# EAGLE board IO V1.0 (EAGLE 9.6.2)
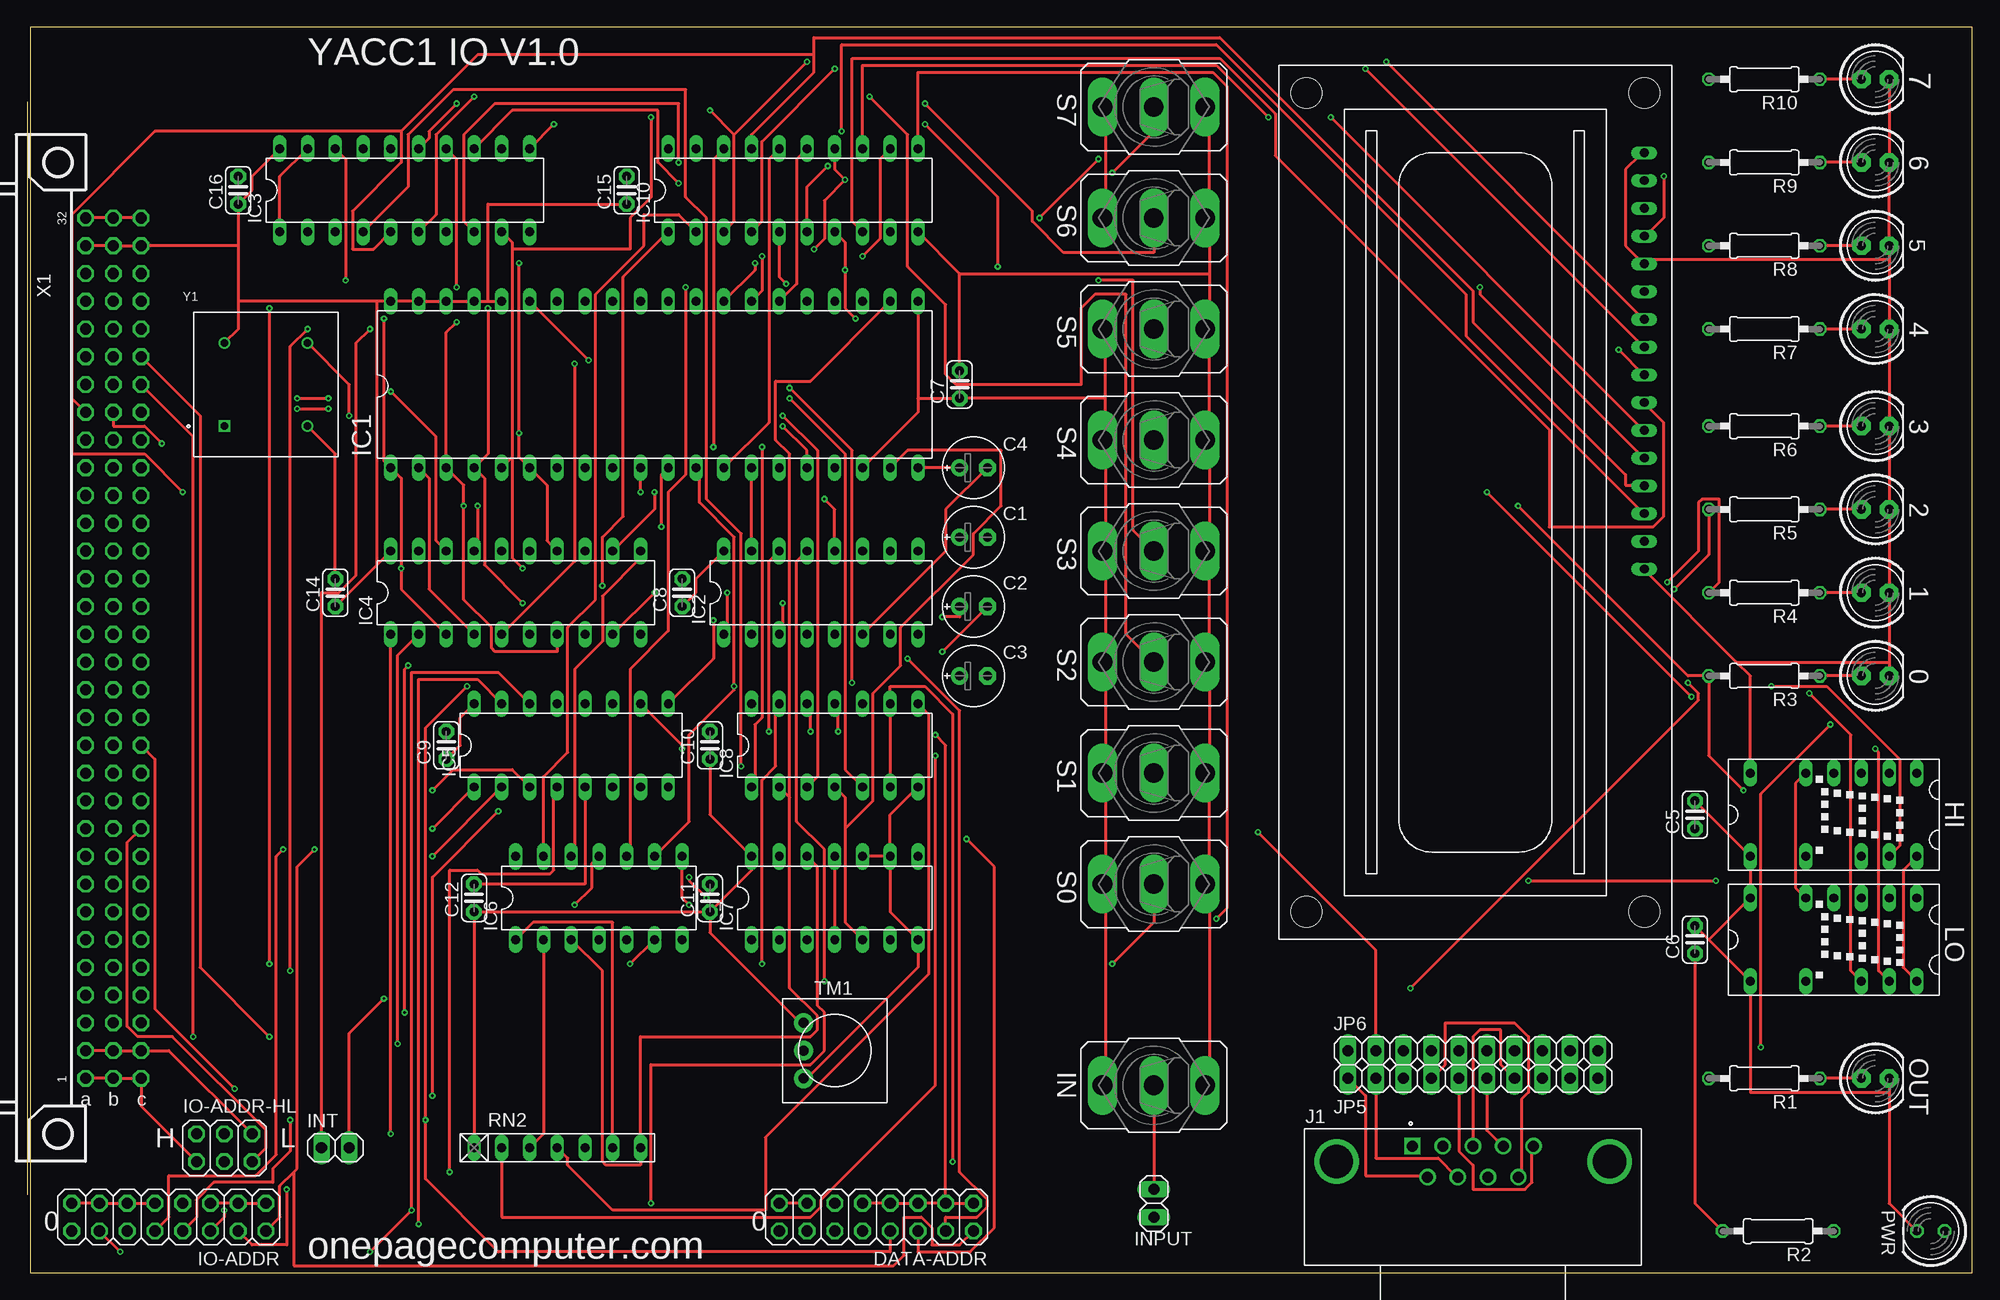
[diagram p0: board, top side]
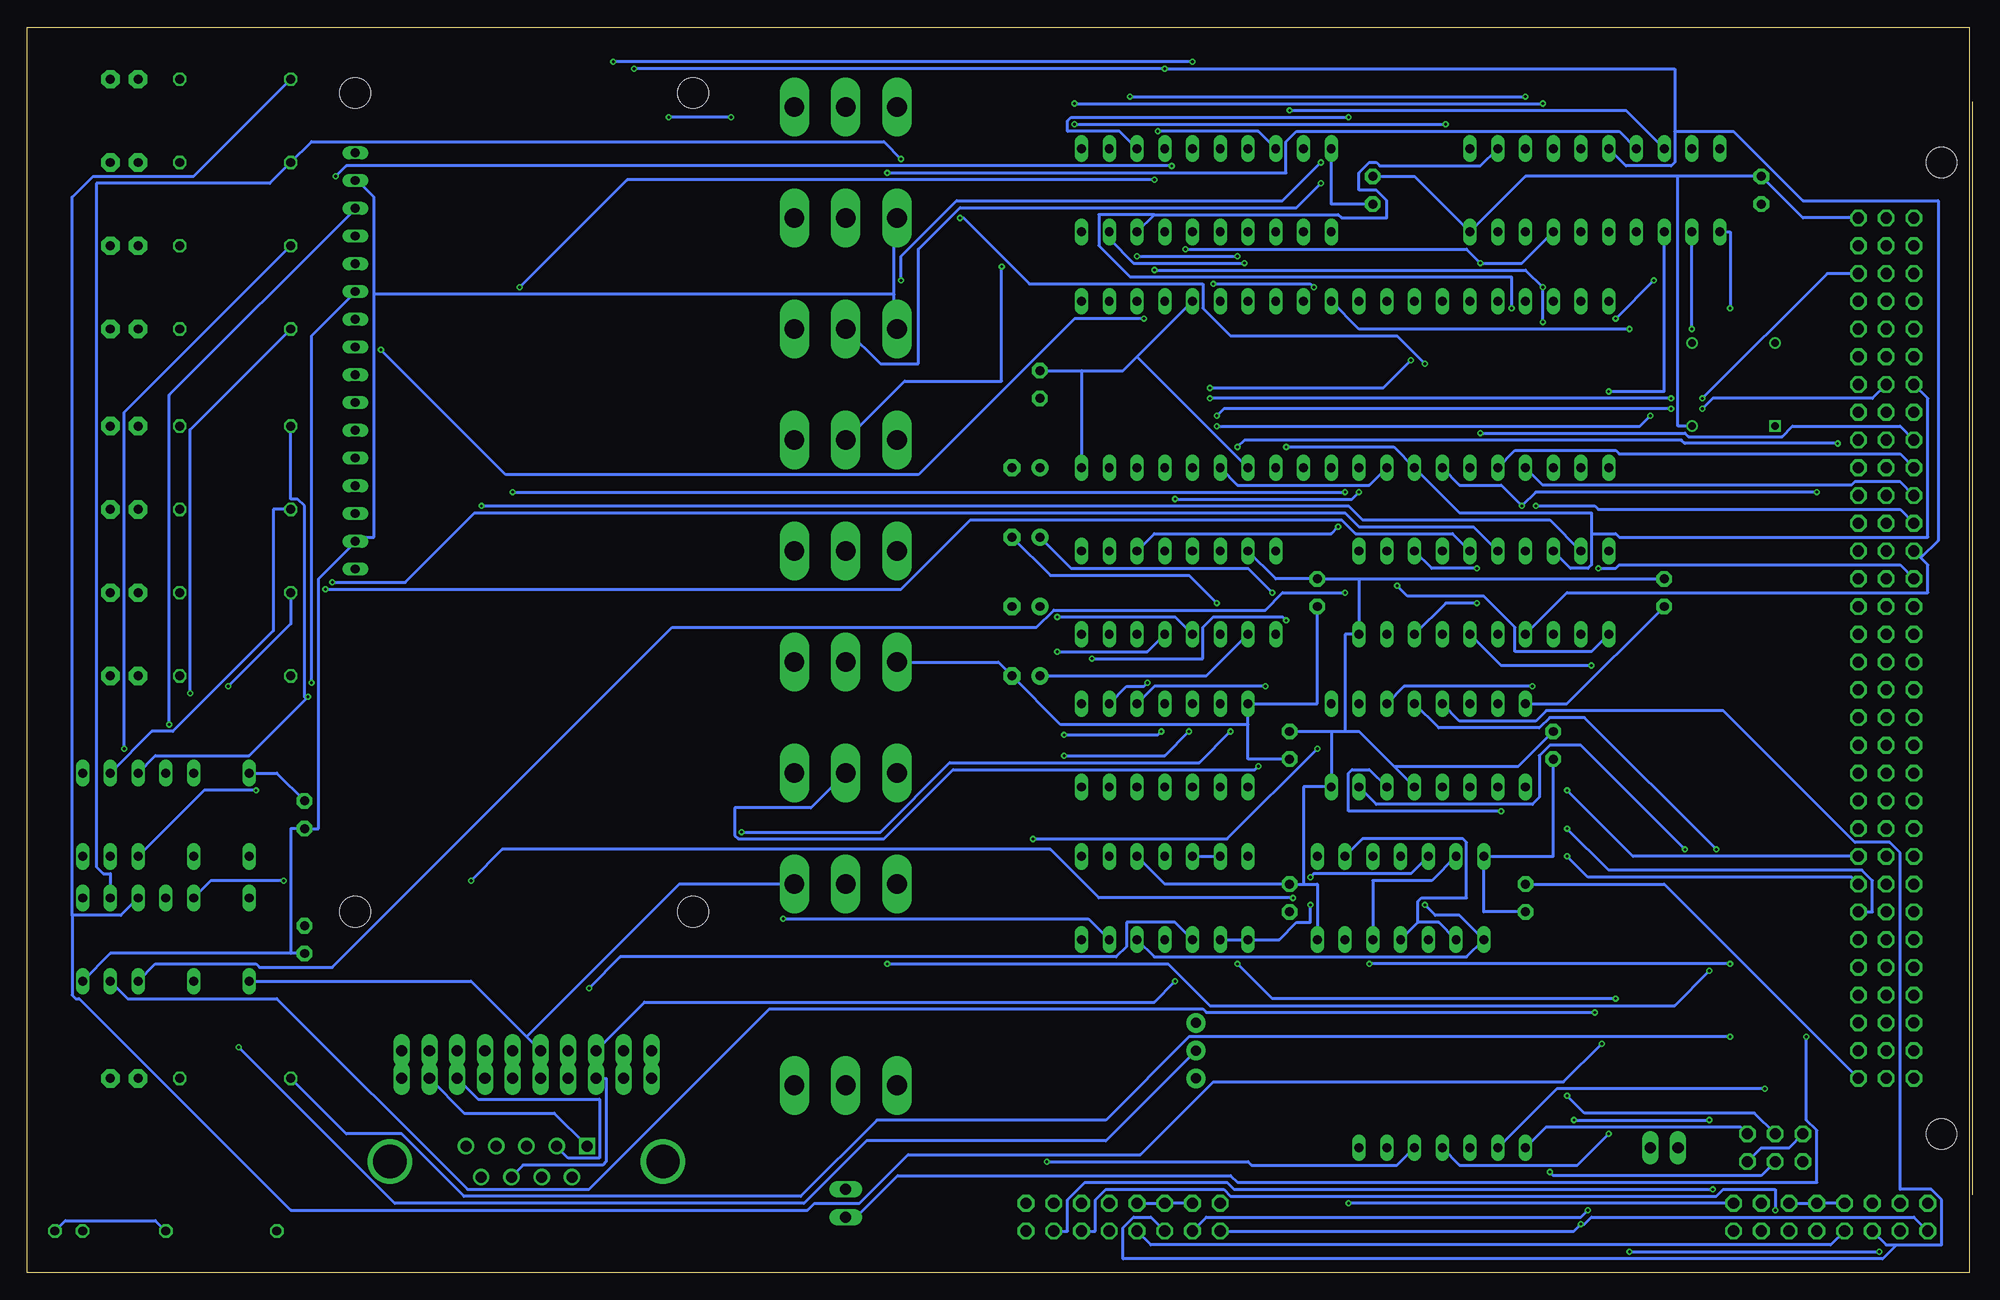
[diagram p1: board, bottom side, seen from below]

Size 177.78 x 113.97 mm. Coordinates in mm from the lower left corner, seen from the top.
Outline: 0,0 177.78,0 177.78,113.97 0,113.97 0,0
Copper layers (1*16): Top 0.035559375mm / dielectric 1.6mm / Bottom 0.035559375mm
Design rules "oshpark-2layer-auto-routing": minimum track width 10mil, minimum drill 10mil, track to track 10mil, track to pad 8mil, pad to pad 8mil, via to via 8mil, smd to smd 6mil, copper to edge 15mil, drill to drill 6mil, minimum pad ring 6mil, minimum via ring 6mil, stop-mask expansion 2.5mil, vias tented up to drill 0mil, thermal gap 10mil
Net classes: 1 GND: width 1 mm; 2 5V: width 1 mm

## Footprints (pad centres in the part's own frame; a part is rotated, then mirrored left to right if it is on the bottom)
LED5MM = drill 0.813 pad 1.676 octagon: A -1.27,0; K 1.27,0
E2,5-6E = drill 0.813 pad 1.575: + -1.27,0 | drill 0.813 pad 1.575 octagon: - 1.27,0
C025-024X044 = drill 0.813 pad 1.422 octagon: 1 -1.27,0; 2 1.27,0
2X08 = drill 1.016 octagon: 1 -8.89,-1.27; 2 -8.89,1.27; 3 -6.35,-1.27; 4 -6.35,1.27; 5 -3.81,-1.27; 6 -3.81,1.27; 7 -1.27,-1.27; 8 -1.27,1.27; 9 1.27,-1.27; 10 1.27,1.27; 11 3.81,-1.27; 12 3.81,1.27; 13 6.35,-1.27; 14 6.35,1.27; 15 8.89,-1.27; 16 8.89,1.27
HTIL311A = drill 0.813 long: 1 -3.81,7.62; 2 -3.81,5.08; 3 -3.81,2.54; 4 -3.81,0; 5 -3.81,-2.54; 7 -3.81,-7.62; 8 3.81,-7.62; 10 3.81,-2.54; 12 3.81,2.54; 13 3.81,5.08; 14 3.81,7.62
DIL40 = drill 0.813 long: 1 -24.13,-7.62; 2 -21.59,-7.62; 3 -19.05,-7.62; 4 -16.51,-7.62; 5 -13.97,-7.62; 6 -11.43,-7.62; 7 -8.89,-7.62; 8 -6.35,-7.62; 9 -3.81,-7.62; 10 -1.27,-7.62; 11 1.27,-7.62; 12 3.81,-7.62; 13 6.35,-7.62; 14 8.89,-7.62; 15 11.43,-7.62; 16 13.97,-7.62; 17 16.51,-7.62; 18 19.05,-7.62; 19 21.59,-7.62; 20 24.13,-7.62; 21 24.13,7.62; 22 21.59,7.62; 23 19.05,7.62; 24 16.51,7.62; 25 13.97,7.62; 26 11.43,7.62; 27 8.89,7.62; 28 6.35,7.62; 29 3.81,7.62; 30 1.27,7.62; 31 -1.27,7.62; 32 -3.81,7.62; 33 -6.35,7.62; 34 -8.89,7.62; 35 -11.43,7.62; 36 -13.97,7.62; 37 -16.51,7.62; 38 -19.05,7.62; 39 -21.59,7.62; 40 -24.13,7.62
DIL16 = drill 0.813 long: 1 -8.89,-3.81; 2 -6.35,-3.81; 3 -3.81,-3.81; 4 -1.27,-3.81; 5 1.27,-3.81; 6 3.81,-3.81; 7 6.35,-3.81; 8 8.89,-3.81; 9 8.89,3.81; 10 6.35,3.81; 11 3.81,3.81; 12 1.27,3.81; 13 -1.27,3.81; 14 -3.81,3.81; 15 -6.35,3.81; 16 -8.89,3.81
DIL20 = drill 0.813 long: 1 -11.43,-3.81; 2 -8.89,-3.81; 3 -6.35,-3.81; 4 -3.81,-3.81; 5 -1.27,-3.81; 6 1.27,-3.81; 7 3.81,-3.81; 8 6.35,-3.81; 9 8.89,-3.81; 10 11.43,-3.81; 11 11.43,3.81; 12 8.89,3.81; 13 6.35,3.81; 14 3.81,3.81; 15 1.27,3.81; 16 -1.27,3.81; 17 -3.81,3.81; 18 -6.35,3.81; 19 -8.89,3.81; 20 -11.43,3.81
DIL14 = drill 0.813 long: 1 -7.62,-3.81; 2 -5.08,-3.81; 3 -2.54,-3.81; 4 0,-3.81; 5 2.54,-3.81; 6 5.08,-3.81; 7 7.62,-3.81; 8 7.62,3.81; 9 5.08,3.81; 10 2.54,3.81; 11 0,3.81; 12 -2.54,3.81; 13 -5.08,3.81; 14 -7.62,3.81
M9040P = drill 1.803 long: 1 0,4.699; 2 0,0; 3 0,-4.699
1X02 = drill 1.016 long: 1 -1.27,0; 2 1.27,0
2X03 = drill 1.016 octagon: 1 -2.54,-1.27; 2 -2.54,1.27; 3 0,-1.27; 4 0,1.27; 5 2.54,-1.27; 6 2.54,1.27
A-DS09A/KG-T2S = drill 1 square: 1 -5.54,1.42 | drill 1: 2 -2.77,1.42; 3 0,1.42; 4 2.77,1.42; 5 5.54,1.42; 6 4.155,-1.42; 7 1.385,-1.42; 8 -1.385,-1.42; 9 -4.155,-1.42 | drill 3.05: P$1 -12.495,0; P$2 12.495,0
1X10 = drill 1.016 long: 1 -11.43,0; 2 -8.89,0; 3 -6.35,0; 4 -3.81,0; 5 -1.27,0; 6 1.27,0; 7 3.81,0; 8 6.35,0; 9 8.89,0; 10 11.43,0
LED5MM' = drill 0.813 octagon: A -1.27,0; K 1.27,0
0207/10 = drill 0.813 octagon: 1 -5.08,0; 2 5.08,0
RN-7 = drill 0.813 long: 1 -7.62,0; 2 -5.08,0; 3 -2.54,0; 4 0,0; 5 2.54,0; 6 5.08,0; 7 7.62,0
TRIM-3386 = drill 0.9 pad 1.778: 1 -2.54,-2.857; 2 0,-2.857; 3 2.54,-2.857
FABC96R = drill 1.016 octagon: A1 -2.54,39.37; A2 -2.54,36.83; A3 -2.54,34.29; A4 -2.54,31.75; A5 -2.54,29.21; A6 -2.54,26.67; A7 -2.54,24.13; A8 -2.54,21.59; A9 -2.54,19.05; A10 -2.54,16.51; A11 -2.54,13.97; A12 -2.54,11.43; A13 -2.54,8.89; A14 -2.54,6.35; A15 -2.54,3.81; A16 -2.54,1.27; A17 -2.54,-1.27; A18 -2.54,-3.81; A19 -2.54,-6.35; A20 -2.54,-8.89; A21 -2.54,-11.43; A22 -2.54,-13.97; A23 -2.54,-16.51; A24 -2.54,-19.05; A25 -2.54,-21.59; A26 -2.54,-24.13; A27 -2.54,-26.67; A28 -2.54,-29.21; A29 -2.54,-31.75; A30 -2.54,-34.29; A31 -2.54,-36.83; A32 -2.54,-39.37; B1 -5.08,39.37; B2 -5.08,36.83; B3 -5.08,34.29; B4 -5.08,31.75; B5 -5.08,29.21; B6 -5.08,26.67; B7 -5.08,24.13; B8 -5.08,21.59; B9 -5.08,19.05; B10 -5.08,16.51; B11 -5.08,13.97; B12 -5.08,11.43; B13 -5.08,8.89; B14 -5.08,6.35; B15 -5.08,3.81; B16 -5.08,1.27; B17 -5.08,-1.27; B18 -5.08,-3.81; B19 -5.08,-6.35; B20 -5.08,-8.89; B21 -5.08,-11.43; B22 -5.08,-13.97; B23 -5.08,-16.51; B24 -5.08,-19.05; B25 -5.08,-21.59; B26 -5.08,-24.13; B27 -5.08,-26.67; B28 -5.08,-29.21; B29 -5.08,-31.75; B30 -5.08,-34.29; B31 -5.08,-36.83; B32 -5.08,-39.37; C1 -7.62,39.37; C2 -7.62,36.83; C3 -7.62,34.29; C4 -7.62,31.75; C5 -7.62,29.21; C6 -7.62,26.67; C7 -7.62,24.13; C8 -7.62,21.59; C9 -7.62,19.05; C10 -7.62,16.51; C11 -7.62,13.97; C12 -7.62,11.43; C13 -7.62,8.89; C14 -7.62,6.35; C15 -7.62,3.81; C16 -7.62,1.27; C17 -7.62,-1.27; C18 -7.62,-3.81; C19 -7.62,-6.35; C20 -7.62,-8.89; C21 -7.62,-11.43; C22 -7.62,-13.97; C23 -7.62,-16.51; C24 -7.62,-19.05; C25 -7.62,-21.59; C26 -7.62,-24.13; C27 -7.62,-26.67; C28 -7.62,-29.21; C29 -7.62,-31.75; C30 -7.62,-34.29; C31 -7.62,-36.83; C32 -7.62,-39.37 | hole 2.794: 0,-44.456; 0,44.456
LCD1602 = drill 0.8 long: 1 8,33.46; 2 10.54,33.46; 3 13.08,33.46; 4 15.62,33.46; 5 18.16,33.46; 6 20.7,33.46; 7 23.24,33.46; 8 25.78,33.46; 9 28.32,33.46; 10 30.86,33.46; 11 33.4,33.46; 12 35.94,33.46; 13 38.48,33.46; 14 41.02,33.46; 15 43.56,33.46; 16 46.1,33.46 | hole 2.8: 2.54,2.54; 2.54,33.46; 77.46,33.46; 77.46,2.54
ECS-2100AX-200 = drill 0.7 square: 1 -3.81,-3.81 | drill 0.7: 4 3.81,-3.81; 5 3.81,3.81; 8 -3.81,3.81

## Placement (x,y rotation side)
0  [LED5MM]  168.91,54.61 0 top
1  [LED5MM]  168.91,62.23 0 top
2  [LED5MM]  168.91,69.85 0 top
3  [LED5MM]  168.91,77.47 0 top
4  [LED5MM]  168.91,86.36 0 top
5  [LED5MM]  168.91,93.98 0 top
6  [LED5MM]  168.91,101.6 0 top
7  [LED5MM]  168.91,109.22 0 top
C1  [E2,5-6E]  86.36,67.31 0 top
C2  [E2,5-6E]  86.36,60.96 0 top
C3  [E2,5-6E]  86.36,54.61 0 top
C4  [E2,5-6E]  86.36,73.66 0 top
C5  [C025-024X044]  152.4,41.91 90 top
C6  [C025-024X044]  152.4,30.48 90 top
C7  [C025-024X044]  85.09,81.28 90 top
C8  [C025-024X044]  59.69,62.23 90 top
C9  [C025-024X044]  38.1,48.26 90 top
C10  [C025-024X044]  62.23,48.26 90 top
C11  [C025-024X044]  62.23,34.29 90 top
C12  [C025-024X044]  40.64,34.29 90 top
C14  [C025-024X044]  27.94,62.23 90 top
C15  [C025-024X044]  54.61,99.06 90 top
C16  [C025-024X044]  19.05,99.06 90 top
DATA-ADDR  [2X08]  77.47,5.08 180 top
HI  HTIL311A  [HTIL311A]  165.1,41.91 270 top
IC1  [DIL40]  57.15,81.28 0 top
IC2  MAX232  [DIL16]  72.39,62.23 0 top
IC3  74LS244N  [DIL20]  34.29,99.06 0 top
IC4  74273N  [DIL20]  44.45,62.23 0 top
IC5  74LS138N  [DIL16]  49.53,48.26 0 top
IC6  74LS10N  [DIL14]  52.07,34.29 0 top
IC7  74LS00N  [DIL14]  73.66,34.29 0 top
IC8  74LS06N  [DIL14]  73.66,48.26 0 top
IC10  74273N  [DIL20]  69.85,99.06 0 top
IN  [M9040P]  102.87,17.14 90 top
INPUT  [1X02]  102.87,6.35 90 top
INT  [1X02]  27.94,11.43 0 top
IO-ADDR  [2X08]  12.7,5.08 180 top
IO-ADDR-HL  [2X03]  17.78,11.43 0 top
J1  A-DS09A/KG-T2S  [A-DS09A/KG-T2S]  132.08,10.16 0 top
JP5  [1X10]  132.08,17.78 0 top
JP6  [1X10]  132.08,20.32 0 top
LO  HTIL311A  [HTIL311A]  165.1,30.48 270 top
OUT  [LED5MM]  168.91,17.78 0 top
PWR  [LED5MM']  173.99,3.81 180 top
R1  [0207/10]  158.75,17.78 180 top
R2  330  [0207/10]  160.02,3.81 180 top
R3  [0207/10]  158.75,54.61 180 top
R4  [0207/10]  158.75,62.23 180 top
R5  [0207/10]  158.75,69.85 180 top
R6  [0207/10]  158.75,77.47 180 top
R7  [0207/10]  158.75,86.36 180 top
R8  [0207/10]  158.75,93.98 180 top
R9  [0207/10]  158.75,101.6 180 top
R10  [0207/10]  158.75,109.22 180 top
RN2  [RN-7]  48.26,11.43 0 top
S0  [M9040P]  102.87,35.56 90 top
S1  [M9040P]  102.87,45.72 90 top
S2  [M9040P]  102.87,55.88 90 top
S3  [M9040P]  102.87,66.04 90 top
S4  [M9040P]  102.87,76.2 90 top
S5  [M9040P]  102.87,86.36 90 top
S6  [M9040P]  102.87,96.52 90 top
S7  [M9040P]  102.87,106.68 90 top
TM1  10k  [TRIM-3386]  73.66,20.32 270 top
X1  FABC96R  [FABC96R]  2.54,57.15 180 top
X2  HD44780LCD-1602  [LCD1602]  114.3,110.49 270 top
Y1  ECS-2100AX-200  [ECS-2100AX-200]  21.59,81.28 0 top

## Library data of the parts
0 1-7 C5-C12 C14-C16 OUT TM1 X2 = adafruit
C1-C4 = rcl; SPICEPREFIX: C
DATA-ADDR INPUT INT IO-ADDR IO-ADDR-HL JP5 JP6 = pinhead
HI LO = display-hp; OC_FARNELL: unknown; OC_NEWARK: unknown
IC1 = exar; MPN: ST16C450CP40; OC_FARNELL: 1294801; OC_NEWARK: 24R1445
IC2 = maxim; MF: MAXIM; MPN: MAX232ACPE+; OC_FARNELL: 9723773; OC_NEWARK: 68K4544
IC3-IC8 IC10 = 74xx-us
IN S0 S1-S7 = switch
J1 = D-Sub Connectors; CREATEDBY: PCBLayout.com; DIGI_KEY_PART_NUMBER: AE10968-ND; MANUFACTURER: Assmann WSW Components; MPN: A-DS 09 A/KG-T2S
PWR = led
R1 R3-R10 = rcl; SPICEPREFIX: R
R2 = eagle-ltspice; SPICEMODEL: NONE; SPICEPREFIX: R
RN2 = resistor-net; OC_FARNELL: unknown; OC_NEWARK: unknown
X1 = con-vg
Y1 = Crystals_Oscillators; CREATED_BY: PCBLayout.com; DIGIKEY_PART_NUMBER: X964-ND; MANUFACTURER: ECS Inc.; MPN: ECS-2100AX-200; PACKAGE: 8-DIP

## Nets
-AC-LD: X1.C22
-AC-LD-INV: X1.C20
-AC-RD: X1.C21
-ADDR-REG-LD0: X1.C4
-ADDR-REG-LD1: X1.C6
-ADDR-REG-RD0: X1.C3
-ADDR-REG-RD1: X1.C5
-ALU-FUNC: X1.C15
-B-RESET: IC4.1 IC8.8 IC10.1 RN2.4
-BUS-EN: X1.C28
-HL-SWAP: X1.C25
-INT: IC8.12 RN2.2 X1.C13
-INTA: X1.C14
-IO-ADDR-LD: X1.C11
-IO-ADDRSEL: IC7.12 IC7.13 IO-ADDR.1 IO-ADDR.3 IO-ADDR.5 IO-ADDR.7 IO-ADDR.9 IO-ADDR.11 IO-ADDR.13 IO-ADDR.15
-IO-DATASEL: DATA-ADDR.1 DATA-ADDR.3 DATA-ADDR.5 DATA-ADDR.7 DATA-ADDR.9 DATA-ADDR.11 DATA-ADDR.13 DATA-ADDR.15 IC8.11
-IO-RD: IC8.1 X1.B25
-IO-SEL0: DATA-ADDR.16 IC5.15 IO-ADDR.16
-IO-SEL1: DATA-ADDR.14 IC5.14 IO-ADDR.14
-IO-SEL2: DATA-ADDR.12 IC5.13 IO-ADDR.12
-IO-SEL3: DATA-ADDR.10 IC5.12 IO-ADDR.10
-IO-SEL4: DATA-ADDR.8 IC5.11 IO-ADDR.8
-IO-SEL5: DATA-ADDR.6 IC5.10 IO-ADDR.6
-IO-SEL6: DATA-ADDR.4 IC5.9 IO-ADDR.4
-IO-SEL7: DATA-ADDR.2 IC5.7 IO-ADDR.2
-IO-WR: IC8.3 X1.B26
-MEM-RD: X1.B23
-MEM-WR: X1.B24
-REG-DN: X1.B21
-REG-FUNC-LD: X1.B8
-REG-FUNC-RD: X1.B7
-REG-LD-HI: X1.B20
-REG-LD-LO: X1.B18
-REG-RD-HI: X1.B19
-REG-RD-LO: X1.B17
-REG-UP: X1.B22
-RESET: IC8.5 X1.C30
-RUN: X1.C29
-SR-LD: X1.C23
-TMP-REG-LD0: X1.B28
-TMP-REG-LD1: X1.B30
-TMP-REG-RD0: X1.B27
-TMP-REG-RD1: X1.B29
-VMA: X1.C12
ADDR0: X1.A3
ADDR1: X1.A4
ADDR2: X1.A5
ADDR3: X1.A6
ADDR4: X1.A7
ADDR5: X1.A8
ADDR6: X1.A9
ADDR7: X1.A10
ADDR8: X1.A11
ADDR9: X1.A12
ADDR10: X1.A13
ADDR11: X1.A14
ADDR12: X1.A15
ADDR13: X1.A16
ADDR14: X1.A17
ADDR15: X1.A18
ALU0: X1.C16
ALU1: X1.C17
ALU2: X1.C18
ALU3: X1.C19
BR-COND: X1.C24
DATA0: IC1.1 IC3.18 IC4.3 IC10.3 X1.A19 X2.7
DATA1: IC1.2 IC3.16 IC4.4 IC10.4 X1.A20 X2.8
DATA2: IC1.3 IC3.14 IC4.7 IC10.7 X1.A21 X2.9
DATA3: IC1.4 IC3.12 IC4.8 IC10.8 X1.A22 X2.10
DATA4: IC1.5 IC3.9 IC4.13 IC10.13 X1.A23 X2.11
DATA5: IC1.6 IC3.7 IC4.14 IC10.14 X1.A24 X2.12
DATA6: IC1.7 IC3.5 IC4.17 IC10.17 X1.A25 X2.13
DATA7: IC1.8 IC3.3 IC4.18 IC10.18 X1.A26 X2.14
DATA8: X1.A27
DATA9: X1.A28
DATA10: X1.A29
DATA11: X1.A30
DATA12: X1.B3
DATA13: X1.B4
DATA14: X1.B5
DATA15: X1.B6
GND: 0.K 1.K 2.K 3.K 4.K 5.K 6.K 7.K C4.+ C5.2 C6.2 C7.2 C8.2 C9.2 C10.2 C11.2 C12.2 C14.2 C15.2 C16.2 HI.7 HI.8 IC1.14 IC1.20 IC1.25 IC2.15 IC3.10 IC4.10 IC5.5 IC5.8 IC6.7 IC7.7 IC7.9 IC7.10 IC8.7 IC10.10 IN.3 IO-ADDR-HL.1 JP6.5 LO.7 LO.8 OUT.K PWR.K S0.3 S1.3 S2.3 S3.3 S4.3 S5.3 S6.3 S7.3 TM1.3 X1.A1 X1.A32 X1.B1 X1.B32 X1.C1 X1.C32 X2.1 X2.5 X2.16 Y1.4
ICLK: IC1.9 IC1.15
IN: INPUT.1 X1.C26
IO-ADDR0: IC5.1 X1.C7
IO-ADDR1: IC5.2 X1.C8
IO-ADDR2: IC5.3 X1.C9
IO-ADDR3: IO-ADDR-HL.2 IO-ADDR-HL.5 X1.C10
IO-RD: IC1.22 IC6.3 IC8.2 RN2.7
IO-SELDATA: IC1.12 IC6.2 IC6.4 IC6.9 IC8.10 RN2.3
IO-WR: IC1.19 IC6.1 IC6.11 IC7.5 IC8.4 RN2.6
LCD-ENABLE: IC6.10 IC10.5
LCD-REGISTER: IC10.6 X2.4
N$1: IC3.2 S0.2
N$2: IC3.4 S1.2
N$3: IC3.6 S2.2
N$4: IC3.8 S3.2
N$5: IC3.11 S4.2
N$6: IC3.13 S5.2
N$7: IC3.15 S6.2
N$8: IC3.17 S7.2
N$9: OUT.A R1.1
N$10: 2.A R5.1
N$11: PWR.A R2.1
N$12: 3.A R6.1
N$13: 4.A R7.1
N$14: 0.A R3.1
N$15: 1.A R4.1
N$16: 5.A R8.1
N$17: 7.A R10.1
N$18: 6.A R9.1
N$19: HI.12 IC4.19 R3.2
N$20: HI.13 IC4.16 R4.2
N$21: HI.2 IC4.15 R5.2
N$22: HI.3 IC4.12 R6.2
N$23: IC4.9 LO.12 R7.2
N$24: IC4.6 LO.13 R8.2
N$25: IC4.5 LO.2 R9.2
N$26: IC4.2 LO.3 R10.2
N$27: IC5.4 IO-ADDR-HL.3
N$28: HI.5 IC4.11 IC6.12 LO.5
N$29: IC5.6 IO-ADDR-HL.4
N$30: IC7.3 X2.6
N$31: IC1.16 Y1.5
N$32: IC3.1 IC3.19 IC6.6
N$33: IC6.8 IC7.1 IC7.2
N$34: IN.2 INPUT.2
N$35: J1.9 JP5.1
N$36: J1.8 JP5.2
N$37: IC1.11 IC2.11
N$38: J1.7 JP5.3
N$39: J1.6 JP5.4
N$40: IC7.6 IC10.11
N$42: J1.5 JP5.5
N$43: J1.4 JP5.6
N$44: TM1.2 X2.3
N$45: J1.3 JP5.7
N$46: IC10.19
N$47: J1.2 JP5.8
N$48: J1.1 JP5.9
N$49: IC2.14 JP6.2
N$50: IC2.13 JP6.3
N$51: C2.- IC2.5
N$52: C2.+ IC2.4
N$53: IC1.31
N$54: IC1.32
N$55: IC1.33
N$56: IC1.34
N$57: IC1.30 INT.1
N$58: IC1.23
N$59: IC1.24
N$60: IC1.29
N$61: IC1.17
N$62: C1.- IC2.3
N$63: C1.+ IC2.1
N$64: C3.+ IC2.2
N$65: C4.- IC2.6
N$66: IC8.13 INT.2
N$67: IC7.4 IC7.11
OUT: R1.2 X1.C27
REG-LD-ID0: X1.B13
REG-LD-ID1: X1.B14
REG-LD-ID2: X1.B15
REG-LD-ID3: X1.B16
REG-RD-ID0: X1.B9
REG-RD-ID1: X1.B10
REG-RD-ID2: X1.B11
REG-RD-ID3: X1.B12
RESET: IC1.35 IC8.6 IC8.9 RN2.5
RX: IC1.10 IC2.12
SWITCH-LED: IC6.5 IC6.13 IC10.2
UART-A0: IC1.28 IC10.9
UART-A1: IC1.27 IC10.12
UART-A2: IC1.26 IC10.15
UART-CS: IC1.13 IC10.16
VCC: C3.- C5.1 C6.1 C7.1 C8.1 C9.1 C10.1 C11.1 C12.1 C14.1 C15.1 C16.1 HI.14 IC1.18 IC1.21 IC1.36 IC1.37 IC1.38 IC1.39 IC1.40 IC2.16 IC3.20 IC4.20 IC5.16 IC6.14 IC7.14 IC8.14 IC10.20 IN.1 IO-ADDR-HL.6 LO.14 R2.2 RN2.1 S0.1 S1.1 S2.1 S3.1 S4.1 S5.1 S6.1 S7.1 TM1.1 X1.A2 X1.A31 X1.B2 X1.B31 X1.C2 X1.C31 X2.2 X2.15 Y1.8

## Tracks (layer width: path | path; a pad name or v marks a point on that pad's centre or on a via)
-B-RESET  (via drill 0.25)
  Top 0.254: RN2.4 49.21,10.48 49.21,9.84 53.34,5.71 67.31,5.71 67.31,12.38 82.23,27.3 82.23,51.12 IC8.8 | v33.02,12.7 IC4.1 | IC10.1 54.29,91.12 54.29,69.22 52.39,67.31 v52.39,62.87
  Bottom 0.254: v33.02,12.7 35.88,9.84 46.67,9.84 RN2.4 | v52.39,62.87 51.44,61.91 44.45,61.91 41.59,59.05 41.59,56.83 34.61,56.83 IC4.1
-INT  (via drill 0.25)
  Top 0.254: v18.73,16.83 11.43,24.13 11.43,46.99 X1.C13 | IC8.12 71.44,51.75 v71.44,49.53 | v82.87,47.31 82.87,17.14 72.39,6.67 72.39,6.03 71.44,5.08 43.18,5.08 RN2.2
  Bottom 0.254: RN2.2 37.78,16.83 v18.73,16.83 | v71.44,49.53 73.66,47.31 v82.87,47.31
-IO-ADDRSEL  (via drill 0.25)
  Top 0.254: IO-ADDR.15 IO-ADDR.13 IO-ADDR.11 IO-ADDR.9 | IO-ADDR.5 IO-ADDR.3 IO-ADDR.1 | IC7.12 72.07,37.15 72.07,24.45 72.71,23.81 72.71,20.32 71.44,19.05 56.83,19.05 v56.83,6.35
  Bottom 0.254: IO-ADDR.9 IO-ADDR.7 IO-ADDR.5 | IC7.12 IC7.13 | IO-ADDR.1 v56.83,6.35
-IO-DATASEL  (via drill 0.25)
  Top 0.254: DATA-ADDR.13 DATA-ADDR.15 | DATA-ADDR.9 DATA-ADDR.7 DATA-ADDR.5 DATA-ADDR.3 | IC8.11 73.98,51.75 v73.98,49.53 | v82.87,49.21 83.82,48.26 DATA-ADDR.3 | DATA-ADDR.3 DATA-ADDR.1
  Bottom 0.254: DATA-ADDR.13 DATA-ADDR.11 DATA-ADDR.9 | v73.98,49.53 74.3,49.21 v82.87,49.21
-IO-RD  (via drill 0.25)
  Top 0.254: IC8.1 66.36,44.77 66.36,50.16 66.99,50.8 v66.99,75.56 | v12.06,75.88 10.48,77.47 7.62,77.47 X1.B25
  Bottom 0.254: v66.99,75.56 66.36,76.2 26.35,76.2 26.04,75.88 v12.06,75.88
-IO-SEL0  (via drill 0.25)
  Top 0.254: IC5.15 40.96,54.29 35.56,54.29 v35.56,4.45
  Bottom 0.254: DATA-ADDR.16 36.2,3.81 v35.56,4.45 35.24,4.45 34.61,5.08 5.08,5.08 IO-ADDR.16
-IO-SEL1  (via drill 0.25)
  Top 0.254: IC5.14 42.86,54.93 34.92,54.93 v34.92,5.71 v31.11,1.91 | v8.26,1.91 IO-ADDR.14
  Bottom 0.254: v34.92,5.71 35.56,5.08 69.85,5.08 DATA-ADDR.14 | v31.11,1.91 v8.26,1.91
-IO-SEL2
  Bottom 0.254: IC5.13 46.67,50.48 39.69,50.48 38.73,51.44 22.54,51.44 10.48,39.37 7.3,39.37 6.35,38.42 6.35,7.62 3.49,7.62 2.54,6.67 2.54,2.54 6.67,2.54 | 6.67,2.54 7.62,2.54 IO-ADDR.12 | DATA-ADDR.12 74.93,5.08 76.52,5.08 77.47,4.13 77.47,1.27 7.94,1.27 6.67,2.54
-IO-SEL3  (via drill 0.25)
  Top 0.254: v23.18,38.73 22.54,38.1 22.54,10.79 20.64,8.89 12.7,8.89 12.7,5.08 IO-ADDR.10
  Bottom 0.254: IC5.12 48.58,49.85 39.37,49.85 38.42,50.8 35.24,50.8 v23.18,38.73 | DATA-ADDR.10 74.93,2.54 12.7,2.54 IO-ADDR.10
-IO-SEL4  (via drill 0.25)
  Top 0.254: v40.01,53.66 36.2,49.85 v36.2,13.97 36.2,8.57 42.86,1.91 78.74,1.91 DATA-ADDR.8 | IO-ADDR.8 15.24,5.08 15.24,6.67 16.83,8.26 22.23,8.26 22.23,9.53 23.81,11.11 v23.81,13.97
  Bottom 0.254: IC5.11 51.75,53.66 v40.01,53.66 | v36.2,13.97 v23.81,13.97
-IO-SEL5  (via drill 0.25)
  Top 0.254: IC5.10 59.69,48.26 v59.69,47.94 | v85.72,39.69 88.27,37.15 88.27,4.13 86.04,1.91 81.28,1.91 DATA-ADDR.6 | IO-ADDR.6 17.78,5.08 v17.78,5.71
  Bottom 0.254: v59.69,47.94 67.94,39.69 v85.72,39.69 | v17.78,5.71 17.78,7.62 22.54,7.62 23.18,6.99 67.63,6.99 68.26,7.62 79.06,7.62 80.01,6.67 80.01,3.81 DATA-ADDR.6
-IO-SEL6  (via drill 0.25)
  Top 0.254: IC5.9 62.55,56.2 v62.55,59.69 | v80.33,56.2 85.09,51.44 85.09,9.21 87.63,6.67 87.63,6.03 86.68,5.08 83.82,5.08 DATA-ADDR.4 | IO-ADDR.4 20.32,2.54 23.5,2.54 v23.5,7.62
  Bottom 0.254: v62.55,59.69 62.87,60.01 69.22,60.01 70.17,59.05 70.17,56.2 v80.33,56.2 | v23.5,7.62 67.31,7.62 67.94,8.26 80.96,8.26 82.55,6.67 82.55,3.81 DATA-ADDR.4
-IO-SEL7  (via drill 0.25)
  Top 0.254: v26.04,38.73 24.45,37.15 24.45,9.53 24.13,9.21 | 24.13,9.21 22.86,7.94 22.86,5.08 IO-ADDR.2 | DATA-ADDR.2 85.09,2.54 82.55,2.54 82.55,4.13 81.6,5.08 80.01,5.08 80.01,1.59 79.06,0.64 24.13,0.64 24.13,9.21
  Bottom 0.254: IC5.7 54.29,42.86 40.01,42.86 39.37,43.5 39.37,47.31 38.42,48.26 35.56,48.26 v26.04,38.73
-IO-WR  (via drill 0.25)
  Top 0.254: IC8.3 72.07,45.4 72.07,75.25 v68.9,78.42 | v24.45,79.06 v27.3,79.06
  Bottom 0.254: v68.9,78.42 68.26,79.06 v27.3,79.06 | v24.45,79.06 23.5,80.01 8.89,80.01 X1.B26
-RESET  (via drill 0.25)
  Top 0.254: IC8.5 74.61,46.04 74.61,74.93 v69.53,80.01 | v24.45,80.01 v27.3,80.01
  Bottom 0.254: v27.3,80.01 v69.53,80.01 | v24.45,80.01 13.02,91.44 X1.C30
DATA0  (via drill 0.25)
  Top 0.254: IC4.3 33.97,62.55 v33.97,64.45 33.97,72.71 IC1.1 32.38,74.3 v32.38,87.31 | v124.14,110.81 147.64,87.31 X2.7 | 64.45,104.14 v71.12,110.81 | 64.45,104.14 64.45,96.2 IC10.3 | 64.45,104.14 v62.23,106.36 | v28.89,90.81 28.89,101.92 IC3.18
  Bottom 0.254: X1.A19 6.35,64.77 32.07,64.77 32.38,64.45 v33.97,64.45 | v71.12,110.81 v124.14,110.81 | IC3.18 31.43,106.36 v62.23,106.36 | v28.89,90.81 v32.38,87.31
DATA1  (via drill 0.25)
  Top 0.254: IC4.4 36.51,62.55 36.51,72.71 IC1.2 | v122.24,110.17 147.64,84.77 X2.8 | v73.66,110.17 66.99,103.5 66.99,96.2 IC10.4
  Bottom 0.254: 4.45,65.41 3.81,64.77 3.81,62.23 36.83,62.23 IC4.4 | 4.45,65.41 X1.A20 | v122.24,110.17 v73.66,110.17 26.99,110.17 26.99,104.46 | IC3.16 31.43,101.28 27.3,101.28 26.99,101.6 26.99,104.46 | 4.45,65.41 2.86,66.99 2.86,98.11 15.24,98.11 21.59,104.46 26.99,104.46
DATA2  (via drill 0.25)
  Top 0.254: IC4.7 48.26,56.83 42.55,56.83 42.23,57.15 42.23,59.05 39.69,61.59 v39.69,70.17 39.69,72.07 IC1.3 38.1,86.04 v39.05,87 | IC3.14 39.05,101.92 v39.05,90.17 | v145.41,84.45 147.64,82.23 X2.9 | v75.56,87.31 74.61,88.27 v74.61,91.76 74.61,94.3 IC10.7
  Bottom 0.254: v39.05,87 v39.05,90.17 40.64,91.76 v74.61,91.76 | X1.A21 6.35,69.85 33.97,69.85 34.29,70.17 v39.69,70.17 | v145.41,84.45 133.99,73.03 96.2,73.03 81.92,87.31 v75.56,87.31
DATA3  (via drill 0.25)
  Top 0.254: v45.09,61.28 41.59,64.77 41.59,72.71 IC1.4 41.91,74.93 v41.91,88.27 | IC10.8 75.25,96.2 75.25,111.12 108.9,111.12 113.98,106.05 113.98,102.23 139.06,77.15 139.06,68.26 148.59,68.26 149.54,69.22 149.54,77.79 147.96,79.38 X2.10
  Bottom 0.254: IC1.4 39.05,72.07 10.79,72.07 10.48,72.39 6.35,72.39 X1.A22 | IC4.8 47.94,61.28 v45.09,61.28 | IC3.12 44.77,101.28 53.98,101.28 54.29,101.6 54.93,101.6 55.88,100.65 55.88,99.06 54.29,99.06 53.34,98.11 53.34,96.52 57.47,96.52 57.78,96.84 74.61,96.84 | IC10.8 74.61,96.84 | v41.91,88.27 41.91,91.12 76.83,91.12 79.69,93.98 79.69,96.84 74.61,96.84
DATA4  (via drill 0.25)
  Top 0.254: 44.13,74.61 IC1.5 | 44.13,93.66 44.13,94.3 IC3.9 | 44.13,93.66 44.13,74.61 | v45.09,64.45 44.13,65.41 44.13,74.61 | v119.06,105.73 147.64,77.15 X2.11 | v113.35,105.73 108.58,110.49 76.2,110.49 IC10.13 | 44.13,93.66 54.93,93.66 54.93,96.52 56.83,98.42 v56.83,105.73
  Bottom 0.254: IC4.13 49.21,64.45 v45.09,64.45 | X1.A23 6.35,74.93 32.07,74.93 32.38,75.25 41.59,75.25 IC1.5 | v113.35,105.73 v119.06,105.73 | v56.83,105.73 82.23,105.73 82.55,105.41 82.55,104.46 77.79,104.46 IC10.13
DATA5  (via drill 0.25)
  Top 0.254: IC4.14 47.31,66.99 47.31,72.07 IC1.6 44.77,74.61 v44.77,76.83 v44.77,92.39 | v132.72,90.17 132.72,89.53 147.64,74.61 X2.12 | IC10.14 73.66,100.97 v74.61,100.01 72.71,98.11 72.71,94.61 v71.75,93.66
  Bottom 0.254: IC3.7 40.96,92.39 v44.77,92.39 46.04,93.66 v71.75,93.66 | X1.A24 6.35,77.47 16.19,77.47 17.14,76.52 25.72,76.52 26.04,76.83 v44.77,76.83 | v132.72,90.17 122.87,100.01 v74.61,100.01
DATA6  (via drill 0.25)
  Top 0.254: IC4.17 40.96,66.36 v40.96,70.17 | 71.75,111.44 71.75,109.86 66.04,104.14 IC10.17 | 71.75,111.44 71.75,113.03 108.9,113.03 132.08,89.85 132.08,87 146.05,73.03 146.05,72.07 147.64,72.07 X2.13 | IC3.5 31.43,93.66 29.53,93.66 29.53,97.16 33.97,101.6 33.97,104.46 | 33.97,104.46 40.96,111.44 71.75,111.44 | 3.81,80.01 X1.A25 | 3.81,80.01 3.81,96.84 11.43,104.46 33.97,104.46 | v13.97,71.44 10.48,74.93 3.81,74.93 3.81,80.01
  Bottom 0.254: IC1.7 46.67,72.07 42.86,72.07 v40.96,70.17 39.69,71.44 v13.97,71.44
DATA7  (via drill 0.25)
  Top 0.254: v33.02,80.64 37.15,76.52 37.15,66.99 IC4.18 | v74.3,104.46 74.3,112.39 108.58,112.39 131.44,89.53 131.44,85.72 147.64,69.53 X2.14 | v62.55,75.56 62.55,101.92 IC10.18
  Bottom 0.254: IC4.18 36.51,64.45 34.92,64.45 34.61,64.77 34.61,67.63 | 34.61,67.63 34.61,69.53 46.67,69.53 IC1.8 52.7,75.56 v62.55,75.56 | IC3.3 27.94,80.64 v33.02,80.64 | X1.A26 3.81,80.01 3.81,67.31 32.07,67.31 32.38,67.63 34.61,67.63 | v74.3,104.46 65.09,104.46 IC10.18
GND
  Top 0.254: 170.18,55.88 1.K 2.K 3.K 4.K 170.18,92.71 | 170.18,55.88 0.K | 7.K 6.K 5.K 170.18,92.71 | X2.1 147.32,102.23 146.05,100.97 146.05,93.98 147.32,92.71 X2.5 147.96,92.71 170.18,92.71 | 156.21,55.88 157.48,54.61 HI.7 | 156.21,55.88 147.96,64.14 X2.16 | PWR.K 170.18,6.35 170.18,16.51 | OUT.K 170.18,16.51 | C6.2 153.67,30.48 | 153.67,30.48 LO.8 157.48,16.51 170.18,16.51 | 153.67,30.48 LO.7 HI.8 C5.2 | 156.21,55.88 170.18,55.88 | IC7.9 IC7.10 | IC7.9 78.74,33.02 IC7.7 81.28,27.94 71.12,17.78 TM1.3 | IC8.7 78.74,41.91 IC7.9 | X1.A1 X1.B1 X1.C1 10.16,15.24 IO-ADDR-HL.1 | C12.2 50.8,35.56 IC5.5 | 107.95,96.52 107.95,91.44 | 107.95,91.44 107.95,86.36 | 107.95,96.52 107.95,106.68 S7.3 | 107.95,96.52 S6.3 | 107.95,76.2 107.95,66.04 | 107.95,55.88 107.95,45.72 | 107.95,35.56 107.95,17.14 IN.3 | 107.95,35.56 107.95,45.72 | 107.95,45.72 S1.3 | 107.95,35.56 S0.3 | 107.95,55.88 107.95,66.04 | 107.95,66.04 S3.3 | 107.95,55.88 S2.3 | 107.95,76.2 107.95,86.36 | 107.95,86.36 S5.3 | 107.95,76.2 S4.3 | X1.A32 X1.B32 X1.C32 | C4.+ IC1.20 | 85.09,91.44 IC10.10 | C7.2 85.09,91.44 | Y1.4 27.94,74.93 C14.2 | IC2.15 IC1.14 | 85.09,91.44 107.95,91.44
  Bottom 0.254: C5.2 154.94,45.72 HI.7 | 132.08,21.59 137.16,26.67 LO.8 | 132.08,21.59 JP6.5 | IC6.7 59.69,35.56 60.96,35.56 | 60.96,35.56 C11.2 73.66,35.56 IC7.10 | 52.7,46.35 55.88,49.53 57.15,49.53 | 52.7,46.35 IC5.5 | C10.2 58.42,49.53 | 58.42,49.53 57.15,49.53 | 58.42,49.53 IC5.8 60.96,44.45 60.96,35.56 | C9.2 41.27,46.35 52.7,46.35 | X1.C1 27.94,35.56 C12.2 | C15.2 50.8,100.33 IC3.10 40.64,100.33 26.67,100.33 | X1.C32 15.24,96.52 C16.2 26.67,100.33 | 76.2,83.82 77.47,82.55 81.28,82.55 | 76.2,83.82 IC1.25 | C7.2 81.28,82.55 | 81.28,82.55 IC1.20 | 55.88,63.5 IC4.10 57.15,58.42 57.15,49.53 | 55.88,63.5 C8.2 63.5,63.5 IC2.15 | 55.88,63.5 C14.2 | IC1.14 76.2,83.82 | 26.67,100.33 26.67,77.47 Y1.4 | 132.08,21.59 118.11,35.56 S0.3
ICLK
  Bottom 0.254: IC1.9 54.93,72.07 66.99,72.07 IC1.15
IN  (via drill 0.25)
  Top 0.254: X1.C26 14.92,76.52 v14.92,21.59
  Bottom 0.254: v14.92,21.59 14.92,13.97 13.97,13.02 13.97,8.26 66.99,8.26 67.63,8.89 98.11,8.89 101.92,5.08 INPUT.1
IO-ADDR0  (via drill 0.25)
  Top 0.254: v36.83,40.64 IC5.1
  Bottom 0.254: v36.83,40.64 33.02,36.83 9.84,36.83 8.89,35.88 8.89,33.02 X1.C7
IO-ADDR1  (via drill 0.25)
  Top 0.254: v36.83,38.1 IC5.2
  Bottom 0.254: v36.83,38.1 34.92,36.2 10.79,36.2 X1.C8
IO-ADDR2  (via drill 0.25)
  Top 0.254: IC5.3 44.13,46.04 38.73,46.04 v36.83,44.13
  Bottom 0.254: v36.83,44.13 30.8,38.1 X1.C9
IO-ADDR3
  Top 0.254: X1.C10 8.89,39.37 8.89,22.54 9.84,21.59 13.02,21.59 21.59,13.02 21.59,11.43 IO-ADDR-HL.5
  Bottom 0.254: IO-ADDR-HL.2 16.51,11.43 19.05,11.43 IO-ADDR-HL.5
IO-RD
  Top 0.254: IC6.3 52.39,27.62 52.39,10.16 52.7,9.84 55.88,9.84 RN2.7 55.88,21.59 71.44,21.59 72.07,22.23 72.07,23.5 69.53,26.04 69.53,43.5 | 69.53,43.5 IC8.2 | IC1.22 71.44,81.6 68.26,81.6 68.26,76.2 69.53,74.93 69.53,43.5
IO-SELDATA  (via drill 0.25)
  Top 0.254: RN2.3 46.99,12.7 IC6.2 | IC1.12 61.28,73.34 61.28,70.48 64.45,67.31 v64.45,53.66 64.45,53.34 60.33,49.21 60.33,41.27 IC6.9
  Bottom 0.254: 50.48,32.07 IC6.4 | 50.48,32.07 48.58,32.07 IC6.2 | IC6.9 55.56,39.69 46.35,39.69 46.04,39.37 46.04,34.29 50.16,34.29 50.48,33.97 50.48,32.07 | IC8.10 74.61,53.66 v64.45,53.66
IO-WR  (via drill 0.25)
  Top 0.254: IC6.1 46.04,32.07 53.34,32.07 RN2.6 | IC6.11 51.44,37.47 51.44,35.24 v49.85,33.66 | IC7.5 74.61,32.07 74.61,40.64 | 74.61,40.64 74.61,43.5 IC8.4 | IC1.19 80.33,75.25 88.9,75.25 88.9,70.17 86.36,67.63 86.36,65.72 79.69,59.05 79.69,55.56 77.15,53.02 77.15,43.18 74.61,40.64
  Bottom 0.254: v49.85,33.66 48.9,32.7 46.67,32.7 IC6.1 46.04,28.89 74.61,28.89 IC7.5
LCD-ENABLE  (via drill 0.25)
  Top 0.254: IC6.10 54.93,38.42 54.93,55.24 58.42,58.74 58.42,71.44 60.01,73.03 v60.01,90.17 | v69.22,90.49 68.58,91.12 IC10.5
  Bottom 0.254: v60.01,90.17 60.33,90.49 v69.22,90.49
LCD-REGISTER  (via drill 0.25)
  Top 0.254: v149.54,100.33 149.54,96.52 147.96,94.93 X2.4 | v73.03,101.28 71.12,99.38 IC10.6
  Bottom 0.254: v149.54,100.33 148.59,101.28 v73.03,101.28
N$1  (via drill 0.25)
  Top 0.254: v25.4,86.36 23.81,84.77 v23.81,27.62 | v99.06,28.26 102.87,32.07 S0.2
  Bottom 0.254: v25.4,86.36 IC3.2 | v23.81,27.62 26.99,24.45 69.53,24.45 73.34,28.26 v99.06,28.26
N$2  (via drill 0.25)
  Top 0.254: IC3.4 34.61,99.38 34.61,104.14 38.73,108.27 60.01,108.27 60.01,98.42 61.91,96.52 61.91,70.8 65.09,67.63 v65.09,46.35
  Bottom 0.254: v65.09,46.35 65.41,46.04 93.03,46.04 99.38,39.69 112.71,39.69 113.03,40.01 113.03,42.55 106.05,42.55 S1.2
N$3  (via drill 0.25)
  Top 0.254: IC3.6 37.15,96.84 37.15,104.14 v40.64,107.63 | v76.83,107.63 80.33,104.14 80.33,92.08 83.82,88.58 83.82,82.23 84.77,81.28 96.2,81.28 96.2,88.27 97.47,89.53 100.33,89.53 100.33,58.42 S2.2
  Bottom 0.254: v76.83,107.63 v40.64,107.63
N$4  (via drill 0.25)
  Top 0.254: IC3.8 39.69,96.2 39.69,104.14 42.55,107 59.37,107 v59.37,101.6 | v97.79,90.81 100.97,90.81 100.97,67.94 S3.2
  Bottom 0.254: v59.37,101.6 62.87,98.11 92.71,98.11 97.79,93.03 v97.79,90.81
N$5  (via drill 0.25)
  Top 0.254: v47.94,105.09 IC3.11 | v81.92,105.09 88.58,98.42 v88.58,92.08
  Bottom 0.254: v81.92,105.09 v47.94,105.09 | v88.58,92.08 88.58,81.6 97.47,81.6 S4.2
N$6  (via drill 0.25)
  Top 0.254: IC3.13 44.13,106.36 57.47,106.36 57.47,101.6 v59.37,99.69
  Bottom 0.254: v59.37,99.69 61.59,97.47 92.39,97.47 96.2,93.66 96.2,83.19 99.69,83.19 S5.2
N$7  (via drill 0.25)
  Top 0.254: IC3.15 36.51,103.82 36.51,104.46 v39.05,107 | v81.92,107 91.76,97.16 91.76,96.2 94.61,93.34 102.87,93.34 S6.2
  Bottom 0.254: v81.92,107 v39.05,107
N$8  (via drill 0.25)
  Top 0.254: v99.06,100.65 102.87,104.46 S7.2
  Bottom 0.254: IC3.17 32.07,104.46 61.59,104.46 62.55,103.5 62.55,100.65 v99.06,100.65
N$9
  Top 0.254: OUT.A R1.1
N$10
  Top 0.254: 2.A R5.1
N$11
  Bottom 0.254: R2.1 166.05,4.76 174.31,4.76 PWR.A
N$12
  Top 0.254: 3.A R6.1
N$13
  Top 0.254: 4.A R7.1
N$14
  Top 0.254: 0.A R3.1
N$15
  Top 0.254: 1.A R4.1
N$16
  Top 0.254: 5.A R8.1
N$17
  Top 0.254: 7.A R10.1
N$18
  Top 0.254: 6.A R9.1
N$19  (via drill 0.25)
  Top 0.254: v136.21,70.17 151.76,54.61 R3.2 153.67,47.31 v156.84,44.13
  Bottom 0.254: IC4.19 38.42,68.9 55.56,68.9 56.83,70.17 v136.21,70.17 | HI.12 161.61,44.13 v156.84,44.13
N$20  (via drill 0.25)
  Top 0.254: v149.86,63.18 152.72,66.04 152.72,70.48 153.03,70.8 154.62,70.8 154.62,63.18 R4.2 | HI.13 171.13,39.05 171.13,46.99 164.47,53.66 v159.38,53.66
  Bottom 0.254: IC4.16 45.4,68.26 55.88,68.26 57.15,69.53 136.84,69.53 143.19,63.18 v149.86,63.18 | v159.38,53.66 153.67,59.37 R4.2
N$21  (via drill 0.25)
  Top 0.254: v150.5,62.55 153.67,65.72 R5.2
  Bottom 0.254: IC4.15 47.31,67.63 56.2,67.63 57.47,68.9 91.44,68.9 97.79,62.55 v150.5,62.55 | HI.2 166.37,49.53 164.47,49.53 155.26,58.74 155.26,69.85 R5.2
N$22  (via drill 0.25)
  Top 0.254: IC4.12 57.15,69.85 v57.15,71.44 | v152.08,52.7 v133.35,71.44
  Bottom 0.254: v133.35,71.44 v57.15,71.44 | HI.3 166.05,47.31 157.48,47.31 v152.08,52.7 152.4,52.7 152.4,70.17 153.03,70.8 153.67,70.8 R6.2
N$23  (via drill 0.25)
  Top 0.254: v57.15,62.23 IC4.9 | v162.88,53.02 166.69,49.21 166.69,27.62 LO.12
  Bottom 0.254: v57.15,62.23 62.87,62.23 64.45,60.64 83.82,60.64 85.41,59.05 118.75,59.05 149.86,27.94 156.53,27.94 156.84,28.26 166.05,28.26 LO.12 | R7.2 162.88,77.15 v162.88,53.02
N$24  (via drill 0.25)
  Top 0.254: v34.61,55.56 34.29,55.24 v34.29,23.81 | v168.91,47.94 169.23,47.62 169.23,27.62 LO.13
  Bottom 0.254: IC4.6 42.86,55.56 v34.61,55.56 | v34.29,23.81 69.85,23.81 70.17,24.13 109.86,24.13 126.36,7.62 137.48,7.62 154.94,25.08 168.59,25.08 LO.13 | R8.2 168.91,78.74 v168.91,47.94
N$25  (via drill 0.25)
  Top 0.254: IC4.5 49.85,65.09 v49.85,83.19 | v97.79,101.92 v92.39,96.52
  Bottom 0.254: v49.85,83.19 52.39,85.72 67.63,85.72 70.17,88.27 70.17,90.49 86.04,90.49 92.08,96.52 v92.39,96.52 | v97.79,101.92 99.38,103.5 151.76,103.5 R9.2 155.57,99.69 171.45,99.69 171.45,37.15 170.81,36.51 170.18,36.51 LO.2
N$26  (via drill 0.25)
  Top 0.254: IC4.2 33.66,56.52 v33.66,20.95
  Bottom 0.254: v33.66,20.95 37.15,17.46 69.22,17.46 75.88,10.79 97.16,10.79 101.6,6.35 105.73,6.35 106.36,5.71 153.67,5.71 173.04,25.08 173.35,25.08 173.67,25.4 173.67,32.7 | 173.67,32.7 169.23,32.7 LO.3 | R10.2 162.56,100.33 171.77,100.33 173.67,98.42 173.67,32.7
N$27  (via drill 0.25)
  Top 0.254: IC5.4 47.94,44.13 47.94,36.83 47.62,36.51 41.27,36.51 40.96,36.83 38.42,36.83 v38.42,9.21
  Bottom 0.254: v38.42,9.21 38.1,8.89 19.05,8.89 IO-ADDR-HL.3
N$28  (via drill 0.25)
  Top 0.254: LO.5 161.61,35.24 161.61,44.77 HI.5 | IC6.12 49.85,38.42 49.85,55.24 52.39,57.78 52.39,61.91 55.88,65.41 IC4.11 | v137.16,35.88 v154.31,35.88 | v61.91,34.29 60.33,35.88 v60.33,36.2
  Bottom 0.254: LO.5 160.97,35.88 v154.31,35.88 | v137.16,35.88 134.3,38.73 84.14,38.73 79.69,34.29 v61.91,34.29 | v60.33,36.2 60.01,36.51 51.12,36.51 IC6.12
N$29  (via drill 0.25)
  Top 0.254: v42.86,42.23 36.83,36.2 v36.83,16.19
  Bottom 0.254: IC5.6 54.93,46.04 56.52,46.04 56.83,45.72 56.83,42.23 v42.86,42.23 | v36.83,16.19 35.24,14.61 19.68,14.61 IO-ADDR-HL.4
N$30  (via drill 0.25)
  Top 0.254: v151.76,53.98 152.72,53.02 152.72,52.39 v126.36,26.04
  Bottom 0.254: v151.76,53.98 151.76,85.72 147.96,89.53 X2.6 | v126.36,26.04 123.51,28.89 78.11,28.89 77.15,29.84 77.15,32.07 72.71,32.07 IC7.3
N$31  (via drill 0.25)
  Top 0.254: Y1.5 29.21,81.28 v29.21,78.42 | v68.9,77.47 71.12,75.25 IC1.16
  Bottom 0.254: v29.21,78.42 30.16,77.47 v68.9,77.47
N$32  (via drill 0.25)
  Top 0.254: v54.93,28.26 IC6.6 | v21.91,88.27 v21.91,28.26 | IC3.19 22.86,100.33 IC3.1
  Bottom 0.254: v21.91,28.26 v54.93,28.26 | v21.91,88.27 21.91,95.25 IC3.1
N$33  (via drill 0.25)
  Top 0.254: IC6.8 59.69,34.29 v60.33,33.66
  Bottom 0.254: IC7.2 IC7.1 63.18,30.48 61.59,32.07 60.33,32.07 v60.33,33.66
N$34
  Top 0.254: IN.2 INPUT.2
N$35
  Top 0.254: JP5.1 122.24,16.19 122.24,8.89 127.64,8.89 J1.9
N$36
  Top 0.254: JP5.2 123.19,10.48 128.91,10.48 130.49,8.89 J1.8
N$37  (via drill 0.25)
  Top 0.254: IC1.11 57.78,73.03 v57.78,68.26
  Bottom 0.254: v57.78,68.26 58.42,67.63 74.61,67.63 IC2.11
N$38
  Bottom 0.254: JP5.3 124.78,17.78 124.78,10.16 125.09,9.84 132.4,9.84 133.35,8.89 J1.7
N$39
  Top 0.254: JP5.4 129.54,19.05 129.54,22.86 135.89,22.86 137.16,21.59 137.16,16.51 136.53,15.88 136.53,8.89 J1.6
N$40  (via drill 0.25)
  Top 0.254: v108.58,32.38 109.54,33.34 109.54,108.58 108.27,109.86 81.28,109.86 IC10.11
  Bottom 0.254: IC7.6 80.64,32.38 v108.58,32.38
N$42
  Top 0.254: JP5.5 130.81,11.11 132.08,9.84 132.08,7.62 136.84,7.62 137.48,8.26 137.48,11.43 J1.5
N$43
  Top 0.254: JP5.6 133.35,13.02 134.62,11.75 J1.4
N$44  (via drill 0.25)
  Top 0.254: v164.78,50.16 158.43,43.81 v158.43,20.64
  Bottom 0.254: v164.78,50.16 164.78,80.33 147.96,97.16 X2.3 | v158.43,20.64 144.15,6.35 106.68,6.35 100.97,12.06 79.06,12.06 TM1.2
N$45
  Top 0.254: J1.3 132.08,21.59 132.72,22.23 134.62,22.23 134.62,19.05 JP5.7
N$47
  Bottom 0.254: JP5.8 136.53,15.88 125.41,15.88 125.41,10.48 128.27,10.48 129.22,11.43 J1.2
N$48
  Bottom 0.254: JP5.9 137.79,14.61 129.54,14.61 126.68,11.75 J1.1
N$49  (via drill 0.25)
  Top 0.254: IC2.14 67.63,65.09 v67.63,49.53 | v112.39,40.32 123.19,29.53 JP6.2
  Bottom 0.254: v67.63,49.53 70.48,46.67 93.34,46.67 99.69,40.32 v112.39,40.32
N$50  (via drill 0.25)
  Top 0.254: IC2.13 70.17,65.09 70.17,41.27 72.71,38.73 v72.71,26.67
  Bottom 0.254: v72.71,26.67 74.61,24.77 121.28,24.77 JP6.3
N$51  (via drill 0.25)
  Top 0.254: C2.- v83.5,56.83
  Bottom 0.254: IC2.5 75.25,56.83 v83.5,56.83
N$52  (via drill 0.25)
  Top 0.254: v83.5,60.01 85.09,60.01 C2.+
  Bottom 0.254: IC2.4 72.71,60.01 v83.5,60.01
N$57  (via drill 0.25)
  Top 0.254: v31.11,86.36 29.84,85.09 29.84,63.82 28.26,62.23 26.67,62.23 INT.1
  Bottom 0.254: IC1.30 55.88,86.36 v31.11,86.36
N$62  (via drill 0.25)
  Top 0.254: IC2.3 68.9,58.74 v68.9,61.28
  Bottom 0.254: v68.9,61.28 71.44,63.82 84.14,63.82 C1.-
N$63  (via drill 0.25)
  Top 0.254: IC2.1 63.82,58.74 v63.82,62.23
  Bottom 0.254: v63.82,62.23 66.04,64.45 82.23,64.45 C1.+
N$64
  Bottom 0.254: IC2.2 69.85,54.61 C3.+
N$65
  Top 0.254: IC2.6 83.82,66.04 83.82,69.85 C4.-
N$66  (via drill 0.25)
  Top 0.254: IC8.13 68.26,51.75 68.26,46.35 66.99,45.09 v66.99,28.26 | v32.38,25.08 29.21,21.91 INT.2
  Bottom 0.254: v66.99,28.26 63.82,25.08 v32.38,25.08
N$67
  Top 0.254: IC7.11 IC7.4
OUT  (via drill 0.25)
  Top 0.254: v21.91,21.59 15.56,27.94 15.56,78.42 X1.C27
  Bottom 0.254: R1.2 148.59,12.7 143.51,12.7 137.79,6.99 107,6.99 100.01,13.97 79.06,13.97 71.44,21.59 v21.91,21.59
RESET  (via drill 0.25)
  Top 0.254: v51.12,83.5 IC1.35 | v69.53,80.96 75.25,75.25 v75.25,53.98 | v84.45,10.16 84.45,51.12 81.92,53.66 78.74,53.66 IC8.9 IC8.6
  Bottom 0.254: v51.12,83.5 53.66,80.96 v69.53,80.96 | v75.25,53.98 75.56,53.66 77.15,53.66 IC8.9 | RN2.5 52.39,9.84 65.72,9.84 66.04,10.16 v84.45,10.16
RX  (via drill 0.25)
  Top 0.254: v55.88,71.44 IC1.10 | v72.71,70.8 73.66,69.85 IC2.12
  Bottom 0.254: v55.88,71.44 56.52,70.8 v72.71,70.8
SWITCH-LED
  Top 0.254: IC10.2 59.37,96.84 56.2,96.84 56.2,93.98 51.75,89.53 51.75,61.59 49.21,59.05 49.21,47.62 46.99,45.4 IC6.13
  Bottom 0.254: IC6.5 54.61,35.88 49.21,35.88 IC6.13
UART-A0  (via drill 0.25)
  Top 0.254: IC1.28 66.36,91.76 v66.36,92.39
  Bottom 0.254: v66.36,92.39 76.52,92.39 78.74,94.61 IC10.9
UART-A1  (via drill 0.25)
  Top 0.254: IC1.27 66.99,89.85 v66.99,93.03 | v76.2,93.03 77.79,94.61 77.79,101.92 IC10.12
  Bottom 0.254: v76.2,93.03 v66.99,93.03
UART-A2
  Top 0.254: IC1.26 70.17,90.49 70.17,101.92 IC10.15
UART-CS
  Top 0.254: IC1.13 67.63,77.79 67.63,101.92 IC10.16
VCC
  Top 0.254: LO.14 171.45,27.94 171.45,36.83 HI.14 | R2.2 152.4,6.35 C6.1 | 98.42,35.56 98.42,17.14 IN.1 | 98.42,55.88 98.42,45.72 | 98.42,45.72 98.42,35.56 | 98.42,35.56 S0.1 | 98.42,45.72 S1.1 | IC1.18 81.28,78.74 81.28,80.01 | IC1.21 81.28,80.01 | 81.28,80.01 C7.1 98.42,80.01 | S6.1 98.42,96.52 98.42,106.68 S7.1 | 98.42,76.2 98.42,66.04 | 98.42,76.2 98.42,80.01 | 98.42,80.01 98.42,86.36 S5.1 | 98.42,76.2 S4.1 | 98.42,66.04 98.42,55.88 | 98.42,55.88 S2.1 | 98.42,66.04 S3.1 | X1.A31 X1.B31 X1.C31 19.05,93.98 | Y1.8 19.05,86.36 19.05,88.9 | 19.05,93.98 C16.1 20.32,99.06 20.32,100.33 IC3.20 | 19.05,93.98 19.05,88.9 | 41.91,88.9 IC1.37 IC1.38 IC1.39 IC1.40 31.75,88.9 | 41.91,88.9 IC1.36 | C15.1 41.91,97.79 41.91,88.9 | 31.75,88.9 19.05,88.9 | IC2.16 60.96,63.5 60.96,62.23 C8.1 | C10.1 62.23,41.91 IC7.14 66.04,36.83 C11.1 | C11.1 62.23,31.11 70.48,22.86 TM1.1 | X1.A2 X1.B2 X1.C2 12.7,20.32 IO-ADDR-HL.6 | C14.1 31.75,64.77 | 31.75,64.77 IC4.20 | IC5.16 39.37,50.8 39.37,48.26 C9.1 | RN2.1 C12.1 C11.1 | 31.75,64.77 31.75,88.9
  Bottom 0.254: LO.14 170.18,29.21 153.67,29.21 | C6.1 153.67,29.21 | 146.05,89.53 146.05,67.31 147.32,67.31 X2.15 147.96,66.67 151.13,63.5 151.13,40.64 C5.1 153.67,40.64 153.67,29.21 | 146.05,89.53 146.05,98.42 147.32,99.69 X2.2 | S2.1 88.9,55.88 C3.- 83.19,50.16 66.04,50.16 | 98.42,89.53 98.42,86.36 S5.1 | 98.42,89.53 98.42,96.52 S6.1 | IC10.20 58.42,97.79 C15.1 | 66.04,50.16 66.04,46.99 C10.1 | 66.04,50.16 IC8.14 59.69,52.07 C8.1 | C12.1 44.45,33.02 IC6.14 38.1,38.1 C9.1 | C14.1 36.83,52.07 IC5.16 | IO-ADDR-HL.6 20.95,13.34 38.73,13.34 RN2.1 | 98.42,89.53 146.05,89.53

## Text on the board
tNames: YACC1 IO V1.0 | H | L | 0 | 0 | onepagecomputer.com